# EAGLE board kamstrup-wifi (EAGLE 7.2.0)
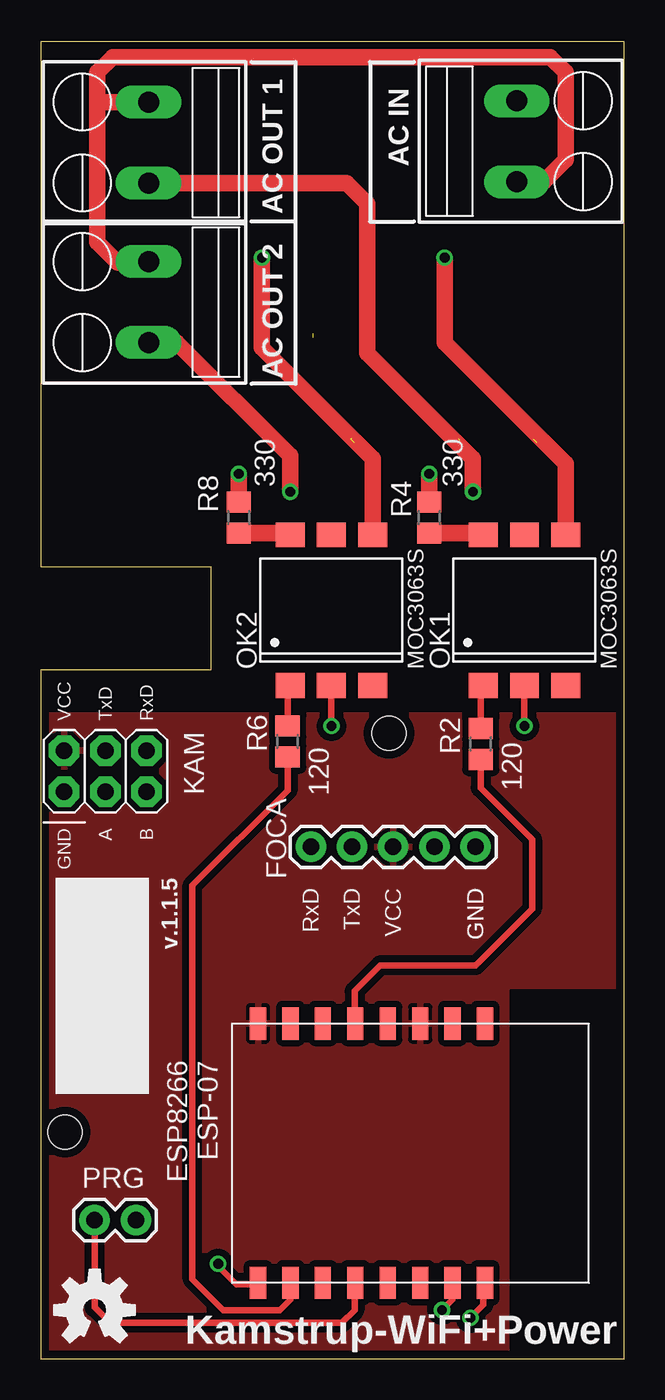
[diagram p0: board, top side]
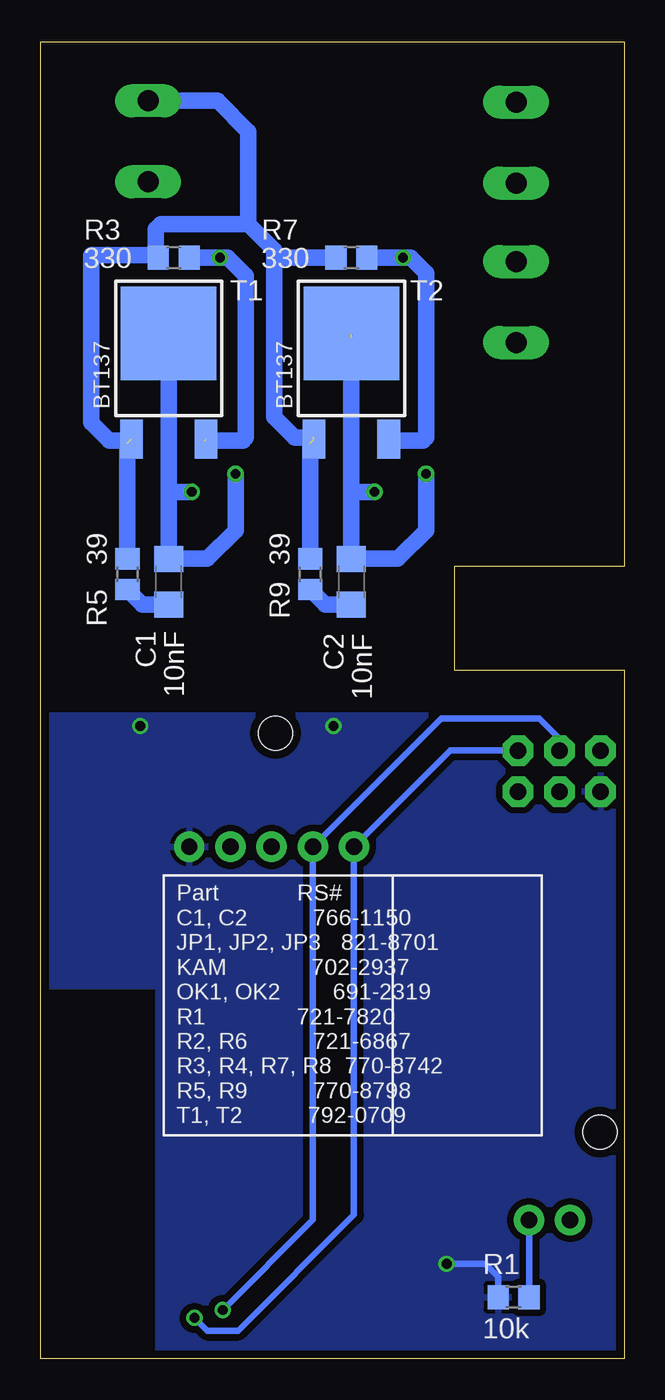
[diagram p1: board, bottom side, seen from below]

Size 36 x 81.28 mm. Coordinates in mm from the lower left corner, seen from the top.
Outline: 0,0 36,0 36,81.28 0,81.28 0,48.9 10.5,48.9 10.5,42.5 0,42.5 0,0
Copper layers (1*16): Top 0.035mm / dielectric 1.5mm / Bottom 0.035mm
Design rules "default *": minimum track width 10mil, minimum drill 24mil, track to track 8mil, track to pad 8mil, pad to pad 8mil, via to via 8mil, smd to smd 8mil, copper to edge 20mil, drill to drill 20mil, minimum pad ring 10mil, minimum via ring 8mil, stop-mask expansion 4mil, vias tented up to drill 0mil, thermal gap 10mil
Holes 2.1 mm at 1.5,14 21.5,38.6

## Footprints (pad centres in the part's own frame; a part is rotated, then mirrored left to right if it is on the bottom)
C1206 = smd 1.6 x 1.8: 1 -1.4,0; 2 1.4,0
1X05 = drill 1.016 pad 1.88: 1 0,0; 2 2.54,0; 3 5.08,0; 4 7.62,0; 5 10.16,0
SCREWTERMINAL-5MM-2 = drill 1.3 pad 2.032 long: 1 0,0; 2 5,0
2X03 = drill 1.016 pad 1.88 octagon: 1 -2.54,-1.27; 2 -2.54,1.27; 3 0,-1.27; 4 0,1.27; 5 2.54,-1.27; 6 2.54,1.27
DIL6-SMD = smd 1.78 x 1.52: 1 -2.54,-4.645; 2 0,-4.645; 3 2.54,-4.645; 4 2.54,4.645; 5 0,4.645; 6 -2.54,4.645
1X02 = drill 1.016 pad 1.88: 1 0,0; 2 2.54,0
R0805 = smd 1.3 x 1.5: 1 -0.95,0; 2 0.95,0
SOT428 = smd 1.4 x 2.4: 1 -2.3,-3.099; 3 2.3,-3.099 | smd 5.9 x 5.75: 4 0,3.426
ESP-07 = smd 1 x 2: ADC -1.6,-8; CH_PD 0.4,-8; GND 10.4,8; GPIO0 4.4,8; GPIO2 6.4,8; GPIO4 0.4,8; GPIO5 2.4,8; GPIO12 6.4,-8; GPIO13 8.4,-8; GPIO14 4.4,-8; GPIO15 8.4,8; GPIO16 2.4,-8; REST -3.6,-8; RXD -1.6,8; TXD -3.6,8; VCC 10.4,-8

## Placement (x,y rotation side)
C1  10nF  [C1206]  28.1,47.94 270 bottom
C2  10nF  [C1206]  16.83,47.94 270 bottom
FOCA  [1X05]  16.67,31.59 0 top
JP1  AC IN  [SCREWTERMINAL-5MM-2]  29.37,77.63 270 top
JP2  AC OUT 1  [SCREWTERMINAL-5MM-2]  6.67,72.55 90 top
JP3  AC OUT 2  [SCREWTERMINAL-5MM-2]  6.67,62.71 90 top
KAM  [2X03]  4,36.27 0 top
OK1  MOC3063S  [DIL6-SMD]  29.84,46.2 0 top
OK2  MOC3063S  [DIL6-SMD]  17.94,46.2 0 top
PRG  M02PTH  [1X02]  5.87,8.57 180 top
R1  10k  [R0805]  6.83,3.81 0 bottom
R2  120  [R0805]  27.15,37.94 90 top
R3  330  [R0805]  27.78,67.94 180 bottom
R4  330  [R0805]  23.97,51.91 90 top
R5  39  [R0805]  30.64,48.42 270 bottom
R6  120  [R0805]  15.24,38.1 90 top
R7  330  [R0805]  16.83,67.94 180 bottom
R8  330  [R0805]  12.22,51.91 90 top
R9  39  [R0805]  19.37,48.42 270 bottom
T1  BT137  [SOT428]  28.1,59.85 0 bottom
T2  BT137  [SOT428]  16.83,59.85 0 bottom
U$1  ESP8266-07  [ESP-07]  23.81,12.7 180 top
U$2  [OSHW-LOGO-M]  3.33,3.02 0 top

## Library data of the parts
C1 C2 R1-R9 = rcl
FOCA KAM PRG = SparkFun-Connectors
JP1-JP3 = TE Terminal Block 45 degrees
OK1 OK2 = optocoupler; MF: FAIRCHILD SEMICONDUCTOR; MPN: MOC3043SM; OC_FARNELL: 1505441; OC_NEWARK: 78K6091
T1 T2 = Triac SOT428
U$1 = lio
U$2 = SparkFun-Aesthetics

## Nets
3.3V: FOCA.3 KAM.2 U$1.CH_PD U$1.VCC
GND: FOCA.5 KAM.1 OK1.2 OK2.2 R1.1 U$1.GND
N$1: FOCA.1 KAM.6 U$1.TXD
N$2: FOCA.2 KAM.4 U$1.RXD
N$3: PRG.2 U$1.GPIO0
N$4: PRG.1 R1.2
N$5: OK2.1 R6.2
N$6: OK2.4 R7.1 T2.3
N$7: OK2.6 R8.1
N$8: C2.1 JP3.1 R8.2 T2.4
N$9: JP1.1 R3.2 R5.1 R7.2 R9.1 T1.1 T2.1
N$10: C2.2 R9.2
N$11: R2.1 U$1.GPIO14
N$12: OK1.1 R2.2
N$13: OK1.4 R3.1 T1.3
N$14: OK1.6 R4.1
N$15: C1.1 JP2.1 R4.2 T1.4
N$16: R6.1 U$1.GPIO15
N$17: C1.2 R5.2
N$18: JP1.2 JP2.2 JP3.2

## Tracks (layer width: path | path; a pad name or v marks a point on that pad's centre or on a via)
3.3V
  pour Top (isolate 0.406): 0,0 28.73,0 28.73,23.02 35.56,23.02 35.56,39.69 0,39.69
GND  (via drill 0.6)
  Top 0.406: OK2.2 v17.94,39.05 | OK1.2 v29.84,39.05 | 13.34,4.6 13.34,3.99 U$1.GND 13.32,4.6 12.06,4.6 10.95,5.71 v10.95,5.87
  Bottom 0.406: v10.95,5.87 8.57,5.87 7.78,5.08 R1.1
  pour Bottom (isolate 0.406): 0,0 28.73,0 28.73,23.02 35.56,23.02 35.56,39.69 0,39.69
N$1  (via drill 0.6)
  Top 0.406: v26.51,2.54 27.3,3.33 27.3,4.59 U$1.TXD
  Bottom 0.406: KAM.6 10.72,37.54 FOCA.1 16.67,8.89 23.81,1.75 25.72,1.75 v26.51,2.54
N$2  (via drill 0.6)
  Top 0.406: U$1.RXD 25.4,4.69 25.4,3.65 v24.77,3.02
  Bottom 0.406: KAM.4 4,38.29 5.24,39.53 11.27,39.53 FOCA.2 19.21,8.57 v24.77,3.02
N$3
  Top 0.406: U$1.GPIO0 19.37,4.02 19.37,3.02 18.57,2.22 4.29,2.22 3.33,3.17 PRG.2
N$4
  Bottom 0.406: PRG.1 R1.2
N$5
  Top 0.406: R6.2 15.24,41.39 OK2.1
N$6  (via drill 0.6)
  Top 1.016: OK2.4 20.48,55.56 13.65,62.39 v13.65,67.94
  Bottom 1.016: R7.1 v13.65,67.94 13.18,67.94 12.22,66.99 12.22,56.83 12.38,56.67 14.45,56.67 T2.3
N$7
  Top 1.016: R8.1 15.28,50.96 OK2.6
N$8  (via drill 0.6)  (1 unrouted)
  Top 1.016: v12.22,54.61 R8.2 | v15.4,53.5 15.4,55.72 8.41,62.71 JP3.1
  Bottom 1.016: 16.83,63.02 16.83,53.5 | 16.83,53.5 C2.1 16.8,49.37 13.97,49.37 12.22,51.12 v12.22,54.61 | v15.4,53.5 16.83,53.5
N$9  (4 unrouted)
  Bottom 1.016: R9.1 19.37,56.52 | R5.1 30.64,56.52 | 30.49,56.67 31.75,56.67 32.86,57.78 32.86,68.11 28.89,68.11 | 19.22,56.83 20.32,56.83 21.59,58.1 21.59,68.26 | 21.59,68.26 21.59,68.42 23.18,70.01 | 23.18,70.01 28.57,70.01 28.89,69.69 28.89,68.11 | 28.89,68.11 R3.2 | R7.2 21.27,67.94 21.59,68.26 | JP1.1 25.08,77.63 23.18,75.72 23.18,70.01
N$10
  Bottom 1.016: C2.2 18.44,46.54 R9.2
N$11
  Top 0.406: R2.1 27.15,35.24 30.32,32.07 30.32,27.78 26.83,24.29 20.95,24.29 19.37,22.7 19.37,20.75 U$1.GPIO14
N$12
  Top 0.406: R2.2 27.15,41.39 OK1.1
N$13  (via drill 0.6)  (1 unrouted)
  Top 1.016: OK1.4 32.38,55.24 24.92,62.71 v24.92,67.94
  Bottom 1.016: 25.88,56.66 23.51,56.66 23.34,56.83 23.34,66.83 24.45,67.94 v24.92,67.94 R3.1
N$14
  Top 1.016: R4.1 27.18,50.96 OK1.6
N$15  (via drill 0.6)
  Top 1.016: v23.97,54.61 R4.2 | JP2.1 18.89,72.55 20.16,71.28 20.16,62.07 26.67,55.56 v26.67,53.5
  Bottom 1.016: 28.1,53.18 C1.1 28.07,49.37 25.72,49.37 23.97,51.12 v23.97,54.61 | 28.1,53.18 T1.4 | v26.67,53.5 27.78,53.5 28.1,53.18
N$16
  Top 0.406: R6.1 15.24,35.08 9.37,29.21 9.37,4.92 11.27,3.02 14.76,3.02 15.4,3.65 15.4,4.71 U$1.GPIO15
N$17
  Bottom 1.016: C1.2 29.71,46.54 R5.2
N$18
  Top 1.016: JP1.2 31.04,72.63 32.38,73.98 32.38,79.38 31.43,80.33 4.45,80.33 3.49,79.38 3.49,77.47 | 3.49,77.47 3.49,68.9 4.76,67.63 6.59,67.63 JP3.2 | JP2.2 3.57,77.55 3.49,77.47

## Text on the board
tNames: AC IN | AC OUT 1 | AC OUT 2 | VCC | TxD | RxD | GND | A | B | v.1.1.5 | RxD | TxD | VCC | GND | GND | ESP8266 / ESP-07 | Kamstrup-WiFi+Power
bNames: Part RS# / C1, C2 766-1150 / JP1, JP2, JP3 821-8701 / KAM 702-2937 / OK1, OK2 691-2319 / R1 721-7820 / R2, R6 721-6867 / R3, R4, R7, R8 770-8742 / R5, R9 770-8798 / T1, T2 792-0709